# EAGLE board UsbStandaloneController (EAGLE 5.11)
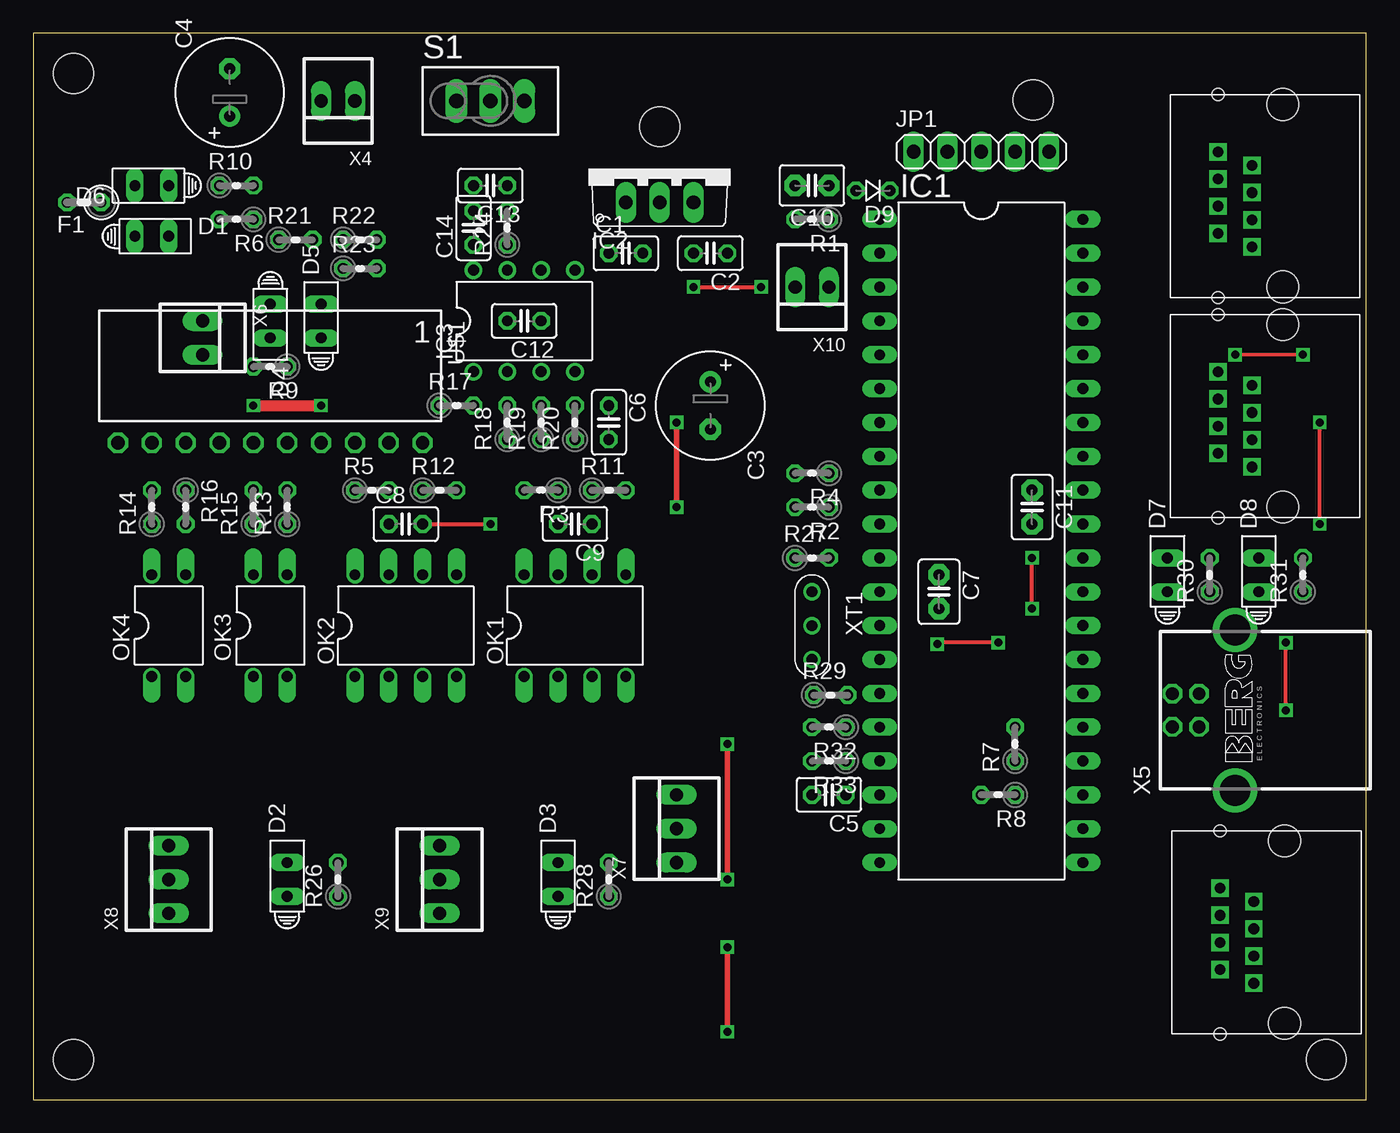
[diagram p0: board, top side]
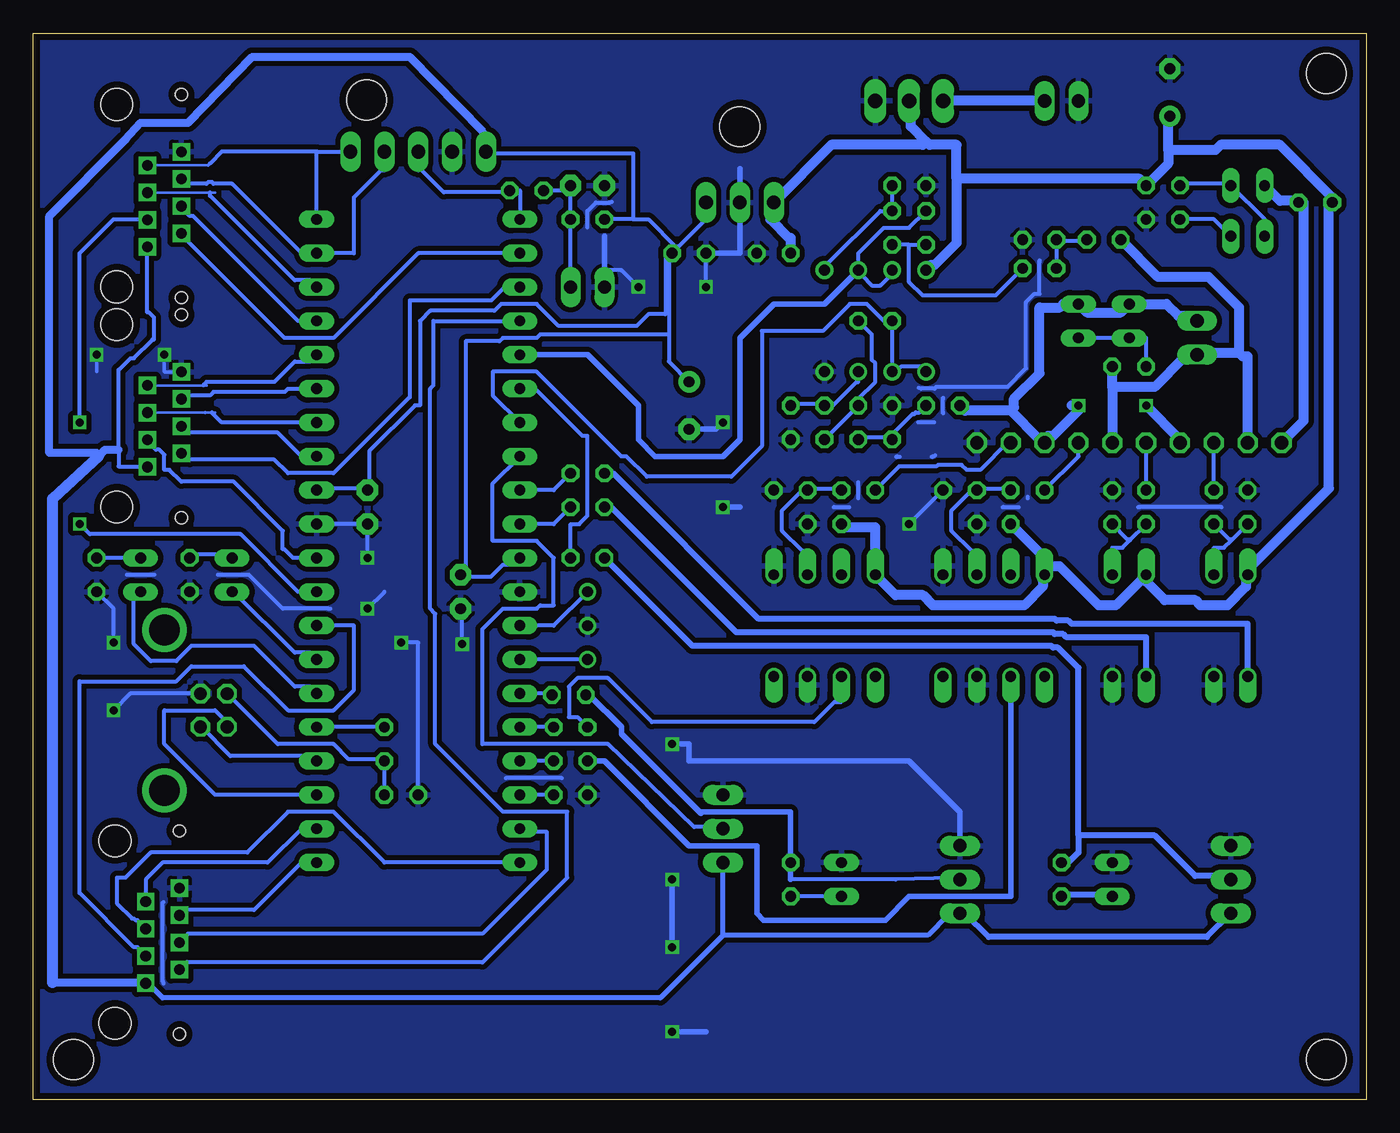
[diagram p1: board, bottom side, seen from below]

Size 100 x 80 mm. Coordinates in mm from the lower left corner, seen from the top.
Outline: 0,0 100,0 100,80 0,80 0,0
Copper layers (1*16): Top 0.035mm / dielectric 1.5mm / Bottom 0.035mm
Design rules "default *": minimum track width 12mil, minimum drill 24mil, track to track 15mil, track to pad 18mil, pad to pad 20mil, via to via 20mil, smd to smd 15mil, copper to edge 20mil, drill to drill 8mil, minimum pad ring 10mil, minimum via ring 8mil, stop-mask expansion 4mil, vias tented up to drill 0mil, thermal gap 10mil
Net classes: 1 pwr: width 0.762 mm
Holes 3 mm at 3,3 3,77 97,3 75,75 47,73

## Footprints (pad centres in the part's own frame; a part is rotated, then mirrored left to right if it is on the bottom)
C025-025X050 = drill 0.813 octagon: 1 -1.27,0; 2 1.27,0
E3,5-8 = drill 0.813 pad 1.6 round: + -1.778,0 | drill 0.813 pad 1.6 octagon: - 1.778,0
C2.5-3 = drill 0.813 pad 1.6 octagon: 1 -1.27,0; 2 1.27,0
HLMP6 = drill 0.813 long: A -1.27,0; K 1.27,0
D-2.5 = drill 0.813 octagon: A 1.27,0; C -1.27,0
0207/2V = drill 0.813 octagon: 1 -1.27,0; 2 1.27,0
DIL40 = drill 0.813 long: 1 -24.13,-7.62; 2 -21.59,-7.62; 3 -19.05,-7.62; 4 -16.51,-7.62; 5 -13.97,-7.62; 6 -11.43,-7.62; 7 -8.89,-7.62; 8 -6.35,-7.62; 9 -3.81,-7.62; 10 -1.27,-7.62; 11 1.27,-7.62; 12 3.81,-7.62; 13 6.35,-7.62; 14 8.89,-7.62; 15 11.43,-7.62; 16 13.97,-7.62; 17 16.51,-7.62; 18 19.05,-7.62; 19 21.59,-7.62; 20 24.13,-7.62; 21 24.13,7.62; 22 21.59,7.62; 23 19.05,7.62; 24 16.51,7.62; 25 13.97,7.62; 26 11.43,7.62; 27 8.89,7.62; 28 6.35,7.62; 29 3.81,7.62; 30 1.27,7.62; 31 -1.27,7.62; 32 -3.81,7.62; 33 -6.35,7.62; 34 -8.89,7.62; 35 -11.43,7.62; 36 -13.97,7.62; 37 -16.51,7.62; 38 -19.05,7.62; 39 -21.59,7.62; 40 -24.13,7.62
TO220V = drill 1.016 long: 1 -2.54,-2.54; 2 0,-2.54; 3 2.54,-2.54
DIL08 = drill 0.813 pad 1.27 round: 1 -3.81,-3.81; 2 -1.27,-3.81; 3 1.27,-3.81; 4 3.81,-3.81; 5 3.81,3.81; 6 1.27,3.81; 7 -1.27,3.81; 8 -3.81,3.81
1X05 = drill 1.016 long: 1 -5.08,0; 2 -2.54,0; 3 0,0; 4 2.54,0; 5 5.08,0
DIL08' = drill 0.813 offset: 1 -3.81,-3.81; 2 -1.27,-3.81; 3 1.27,-3.81; 4 3.81,-3.81; 5 3.81,3.81; 6 1.27,3.81; 7 -1.27,3.81; 8 -3.81,3.81
DIL04 = drill 0.813 offset: 1 -1.27,-3.81; 2 1.27,-3.81; 3 1.27,3.81; 4 -1.27,3.81
0204V = drill 0.813 octagon: 1 -1.27,0; 2 1.27,0
TL3XPO = drill 1.1 pad 1.422 long: 1 -2.54,0; 2 0,0; 3 2.54,0
SSW-110-02-S-S-RA = drill 1 pad 1.5 octagon: 1 -11.43,1.524; 2 -8.89,1.524; 3 -6.35,1.524; 4 -3.81,1.524; 5 -1.27,1.524; 6 1.27,1.524; 7 3.81,1.524; 8 6.35,1.524; 9 8.89,1.524; 10 11.43,1.524
C-00159 = drill 0.8 square: P$1 0,0.8; P$2 2.54,-0.22; P$3 0,-1.24; P$4 2.54,-2.26; P$5 0,-3.28; P$6 2.54,-4.3; P$7 0,-5.32; P$8 2.54,-6.34 | hole 2.4: -2.3,-9.885; -2.3,3.805 | hole 0.9: 2.54,4.605; 2.54,-10.635
22-23-2021 = drill 1 long: 1 -1.27,0; 2 1.27,0
PN61729-S = drill 0.95 octagon: 1 1.25,4.71; 2 -1.25,4.71; 3 -1.25,2.71; 4 1.25,2.71 | drill 2.3 pad 2.9 round: S1 -6.02,0; S2 6.02,0
22-23-2031 = drill 1 long: 1 -2.54,0; 2 0,0; 3 2.54,0
S3P = drill 0.8 round: P$1 -2.54,0; P$2 0,0; P$3 2.54,0

## Placement (x,y rotation side)
C1  0.1uF  [C025-025X050]  44.45,63.5 0 top
C2  0.1uF  [C025-025X050]  50.8,63.5 180 top
C3  470uF  [E3,5-8]  50.8,52.07 270 top
C4  470uF  [E3,5-8]  14.73,75.56 90 top
C5  0.47uF  [C025-025X050]  59.69,22.86 180 top
C6  47pF  [C025-025X050]  43.18,50.8 270 top
C7  0.1uF  [C2.5-3]  67.94,38.1 270 top
C8  [C025-025X050]  27.94,43.18 0 top
C9  [C025-025X050]  40.64,43.18 180 top
C10  [C2.5-3]  58.42,68.58 180 top
C11  0.1uF  [C2.5-3]  74.93,44.45 270 top
C12  47pF  [C025-025X050]  36.83,58.42 180 top
C13  47pF  [C025-025X050]  34.29,68.58 180 top
C14  47pF  [C025-025X050]  33.02,65.41 90 top
D1  HLMP6  [HLMP6]  8.89,64.77 0 top
D2  HLMP6  [HLMP6]  19.05,16.51 90 top
D3  HLMP6  [HLMP6]  39.37,16.51 90 top
D4  HLMP6  [HLMP6]  17.78,58.42 270 top
D5  HLMP6  [HLMP6]  21.59,58.42 90 top
D6  HLMP6  [HLMP6]  8.89,68.58 180 top
D7  HLMP6  [HLMP6]  85.09,39.37 90 top
D8  HLMP6  [HLMP6]  91.95,39.37 90 top
D9  [D-2.5]  62.99,68.2 180 top
F1  POLYSWITCH  [0207/2V]  3.81,67.31 180 top
IC1  PIC18F4550_40  [DIL40]  71.12,41.91 270 top
IC2  7805TV  [TO220V]  46.99,69.85 0 top
IC3  AD648N  [DIL08]  36.83,58.42 0 top
JP1  [1X05]  71.12,71.12 0 top
OK1  HCPL4502  [DIL08']  40.64,35.56 0 top
OK2  HCPL4502  [DIL08']  27.94,35.56 0 top
OK3  PC817  [DIL04]  17.78,35.56 0 top
OK4  PC817  [DIL04]  10.16,35.56 0 top
R1  10k ohm  [0204V]  58.42,66.04 180 top
R2  330 ohm  [0204V]  58.42,44.45 180 top
R3  330ohm  [0204V]  38.1,45.72 180 top
R4  330 ohm  [0204V]  58.42,46.99 180 top
R5  330ohm  [0204V]  25.4,45.72 0 top
R6  1kohm  [0204V]  15.24,66.04 180 top
R7  100kohm  [0204V]  73.66,26.67 90 top
R8  100kohm  [0204V]  72.39,22.86 180 top
R9  2k Ohm  [0204V]  17.78,54.99 180 top
R10  10k ohm  [0204V]  15.24,68.58 0 top
R11  10kohm  [0204V]  43.18,45.72 0 top
R12  10k ohm  [0204V]  30.48,45.72 0 top
R13  10kohm  [0204V]  19.05,44.45 90 top
R14  10kohm  [0204V]  8.89,44.45 90 top
R15  330ohm  [0204V]  16.51,44.45 90 top
R16  330ohm  [0204V]  11.43,44.45 270 top
R17  1.8k ohm  [0204V]  31.75,52.07 0 top
R18  1.3k ohm  [0204V]  35.56,50.8 90 top
R19  330kohm  [0204V]  38.1,50.8 90 top
R20  330k ohm  [0204V]  40.64,50.8 90 top
R21  1.8k ohm  [0204V]  19.68,64.52 0 top
R22  1.3k ohm  [0204V]  24.51,64.52 0 top
R23  330k ohm  [0204V]  24.51,62.36 0 top
R24  330k ohm  [0204V]  35.56,65.41 90 top
R26  1kohm  [0204V]  22.86,16.51 90 top
R27  10kOhm  [0204V]  58.42,40.64 0 top
R28  1kOhm  [0204V]  43.18,16.51 90 top
R29  10kOhm  [0204V]  59.82,30.35 0 top
R30  1kohm  [0204V]  88.27,39.37 90 top
R31  1kohm  [0204V]  95.25,39.37 90 top
R32  330ohm  [0204V]  59.69,27.94 180 top
R33  330ohm  [0204V]  59.69,25.4 180 top
S1  TL32PO  [TL3XPO]  34.29,74.93 0 top
U$1  MP4212  [SSW-110-02-S-S-RA]  17.78,50.8 180 top
X1  AKI-RJ45  [C-00159]  91.44,48.26 180 top
X2  AKI-RJ45  [C-00159]  91.57,9.53 180 top
X3  AKI-RJ45  [C-00159]  91.44,64.77 180 top
X4  22-23-2021  [22-23-2021]  22.86,74.93 180 top
X5  PN61729-S  [PN61729-S]  90.17,29.21 90 top
X6  22-23-2021  [22-23-2021]  12.7,57.15 270 top
X7  22-23-2031  [22-23-2031]  48.26,20.32 90 top
X8  22-23-2031  [22-23-2031]  10.16,16.51 90 top
X9  22-23-2031  [22-23-2031]  30.48,16.51 90 top
X10  22-23-2021  [22-23-2021]  58.42,60.96 180 top
XT1  CSTLS  [S3P]  58.42,35.56 270 top

## Library data of the parts
C1-C6 C8 C9 C12-C14 R1 R7 R8 R26-R29 = rcl
C7 C10 C11 = capacitor-wima
D1-D8 = display-hp; MF: AGILENT TECHNOLOGIES; MPN: HLMP-6500; OC_FARNELL: 1652490; OC_NEWARK: 40K0088
D9 = diode
F1 U$1 X1-X3 = myparts
IC1 = microchip; MF: MICROCHIP; MPN: PIC18F4550-I/P; OC_FARNELL: 9321357; OC_NEWARK: 74K8623
IC2 IC3 = linear
JP1 = pinhead
OK1 OK2 = optocoupler; MF: AGILENT TECHNOLOGIES; MPN: HCPL-4502-000E; OC_FARNELL: 9994777; OC_NEWARK: 31K7017
OK3 OK4 = optocoupler; MPN: PC817X4J000F; OC_FARNELL: 9707727; OC_NEWARK: 97K7059
R2-R6 R9-R24 R30-R33 = resistor
S1 = switch
X4 X6 X10 = con-molex; MF: MOLEX; MPN: 22-23-2021; OC_FARNELL: 1462926; OC_NEWARK: 25C3832
X5 = con-berg; OC_FARNELL: unknown; OC_NEWARK: unknown
X7-X9 = con-molex; MF: MOLEX; MPN: 22-23-2031; OC_FARNELL: 1462950; OC_NEWARK: 30C0862
XT1 = TOG

## Nets
+5V: C2.1 C3.+ C7.1 C11.1 IC1.11 IC1.32 IC2.3 JP1.1 R1.2 X1.P$1 X2.P$1 X3.P$1 X7.1 X8.1 X9.1
+12V [pwr]: C1.1 C4.+ C8.1 C9.2 F1.2 IC2.1 IC3.8 OK1.8 OK2.8 OK3.4 OK4.4 R10.2 S1.2
AN5: IC1.8 X7.2
FEEDBACK_LEFT: C12.2 IC1.7 IC3.1 IC3.2
FEEDBACK_RIGHT: C14.2 IC1.5 IC3.6 IC3.7
GND: C1.2 C2.2 C3.- C4.- C5.2 C6.2 C7.2 C8.2 C9.1 C10.2 C11.2 C13.2 D2.K D3.K IC1.12 IC1.31 IC2.2 IC3.4 JP1.2 OK1.3 OK1.5 OK2.3 OK2.5 OK3.2 OK4.2 R6.1 R8.2 R11.2 R12.2 R13.2 R14.2 R18.2 R22.2 R30.1 R31.1 S1.3 U$1.1 X1.P$8 X2.P$8 X3.P$8 X4.2 X5.4 X7.3 X8.3 X9.3 X10.2 XT1.P$2
HIGH_LEFT: IC1.10 R2.1
HIGH_RIGHT: IC1.9 R4.1
IC1_RA0: IC1.2 X3.P$2
IC1_RA1: IC1.3 X1.P$2
IC1_RA2: IC1.4 X2.P$2
IC1_RB0: IC1.33 X1.P$4
IC1_RB1: IC1.34 X1.P$5
IC1_RB2: IC1.35 X1.P$6
IC1_RB3: IC1.36 X1.P$7
IC1_RB4: IC1.37 X3.P$4
IC1_RB5: IC1.38 X3.P$5
IC1_RB6: IC1.39 JP1.4 X3.P$6
IC1_RB7: IC1.40 JP1.5 X3.P$7
IC1_RD0: IC1.19 X2.P$4
IC1_RD1: IC1.20 X2.P$5
IC1_RD2: IC1.21 X2.P$6
IC1_RD3: IC1.22 X2.P$7
IC1_RD5: IC1.28 X2.P$3
IC1_RD6: IC1.29 X3.P$3
IC1_RD7: IC1.30 X1.P$3
LOW_LEFT: IC1.16 R32.1
LOW_RIGHT: IC1.17 R33.1
N$1: C5.1 IC1.18
N$2: IC1.14 XT1.P$3
N$3: R17.2 R18.1 R19.1
N$4: D9.C IC1.1 JP1.3
N$5: R3.2 U$1.2
N$6: C12.1 R19.2 R20.1
N$7: R5.1 U$1.4
N$8 [pwr]: S1.1 X4.1
N$9: C6.1 IC3.3 R20.2
N$10: C10.1 D9.A R1.1 X10.1
N$11: C14.1 R23.2 R24.1
N$12: R21.2 R22.1 R23.1
N$13: C13.1 IC3.5 R24.2
N$14: IC1.13 XT1.P$1
N$15: D1.K R6.2
N$16: IC1.25 R7.2
N$17: R7.1 R8.1 X5.1
N$18: R26.2 R27.1 X8.2
N$19: D2.A R26.1
N$20: R28.2 R29.1 X9.2
N$21: D3.A R28.1
N$22: D7.K R30.2
N$23: D8.K R31.2
N$24: OK3.1 R2.2
N$25 [pwr]: D6.K F1.1 U$1.10
N$26: OK1.6 R3.1 R11.1
N$27: IC1.24 X5.3
N$28: OK1.2 R32.2
N$29: IC1.23 X5.2
N$30: OK2.6 R5.2 R12.1
N$31: OK2.2 R33.2
N$35: D4.K D5.A R9.2
N$36: D1.A D6.A R10.1
N$38: OK4.1 R4.2
N$39: R15.2 U$1.6
N$41: OK3.3 R13.1 R15.1
N$42: OK4.3 R14.1 R16.2
N$43: R16.1 U$1.8
RA4: IC1.6 R27.2
RC0: IC1.15 R29.2
RC7: D8.A IC1.26
RD4: D7.A IC1.27
V+ [pwr]: D4.A D5.K R17.1 U$1.3 U$1.7 X6.1
V- [pwr]: R9.1 R21.1 U$1.5 U$1.9 X6.2

## Tracks (layer width: path | path; a pad name or v marks a point on that pad's centre or on a via)
+5V
  Bottom 0.305: X3.P$1 91.44,59.05 91.31,59.05 90.93,58.67 90.93,57.02 91.06,57.02 92.46,55.63 92.71,55.63 93.6,54.74 93.6,48.77 93.6,47.5 91.44,47.5 X1.P$1 | 91.69,8.76 X2.P$1 91.82,8.76 | C2.1 49.53,66.04 IC2.3 | 54.99,66.04 53.85,66.04 51.82,64.01 51.69,64.01 C2.1 | 54.99,66.04 R1.2 | 54.99,66.04 54.99,70.99 66.04,70.99 JP1.1 66.04,72.52 66.29,72.64 | 95.06,48.32 95.25,48.51 | IC1.11 64.01,40.13 64.77,40.13 65.66,39.24 67.82,39.24 C7.1 67.56,39.37 67.56,56.9 65.02,56.9 64.77,57.15 62.23,57.15 61.98,57.4 52.32,57.4 | C3.+ 52.32,55.37 52.32,57.4 | 52.32,57.4 52.32,63.37 52.07,63.37 C2.1 | IC1.32 78.61,45.85 75.06,45.85 C11.1 75.06,45.97 74.8,45.97 74.8,48.64 71.37,52.07 70.99,52.07 70.99,58.42 70.23,59.18 65.41,59.18 64.9,59.69 62.23,59.69 60.58,58.04 54.74,58.04 53.85,58.93 52.58,58.93 52.58,63.37 52.32,63.63 52.2,63.63 C2.1
  Bottom 0.381: 48.26,12.32 X7.1 | 48.26,12.32 32.89,12.32 31.37,13.84 30.61,13.84 X9.1 | 48.26,12.32 52.96,7.62 90.3,7.62 91.31,8.64 91.57,8.64 X2.P$1
  Bottom 0.457: X8.1 11.94,12.19 28.32,12.19 30.1,13.97 X9.1
  Bottom 0.61: 95.06,48.32 94.61,48.77 93.6,48.77 | 91.82,8.76 98.55,8.76 | 66.29,72.64 71.75,78.23 83.57,78.23 88.39,73.28 91.95,73.28 93.09,72.01 98.81,66.29 98.81,48.51 95.25,48.51
  Bottom 0.813: 95.06,48.32 98.55,45.09 98.55,8.76
+12V
  Bottom 0.762: OK2.8 24.13,40.64 | C9.2 39.24,43.18 38.99,42.93 36.83,42.93 OK1.8 35.31,37.85 33.27,37.85 32.51,37.08 25.65,37.08 24.26,38.48 24.26,38.99 24.13,38.99 OK2.8 | C8.1 24.38,40.89 OK2.8 | C1.1 43.18,64.64 43.31,64.64 44.7,66.04 44.7,67.31 IC2.1 40.13,71.63 33.27,71.63 33.02,71.88 | OK2.8 23.88,40.01 22.99,40.01 20.07,37.08 18.8,37.08 OK3.4 16.51,38.86 15.11,37.47 12.83,37.47 12.45,37.08 10.41,37.08 9.02,38.48 9.02,39.12 OK4.4 8.89,39.75 2.79,45.85 2.79,67.06 F1.2 2.41,67.56 6.48,71.63 10.92,71.63 11.3,71.25 14.86,71.25 | 14.86,71.25 14.86,73.79 C4.+ | 14.86,71.25 14.86,70.23 R10.2 17.02,69.09 30.73,69.09 | IC3.8 32.64,62.61 32.38,62.61 30.73,64.26 30.73,69.09 | 30.73,69.09 30.73,71.63 32.77,71.63 33.02,71.88 | 33.02,71.88 34.16,73.03 34.16,74.93 S1.2
AN5
  Bottom 0.305: IC1.8 65.53,46.23 65.53,41.91 62.23,41.91 60.96,40.64 60.96,37.08 61.98,37.08 62.23,36.83 64.77,36.83 66.29,35.31 66.29,26.67 56.9,26.67 50.42,20.45 48.39,20.45 X7.2
FEEDBACK_LEFT
  Bottom 0.305: IC3.1 33.4,54.99 34.92,54.99 35.31,54.61 IC3.2 C12.2 36.2,58.42 37.47,59.69 38.73,59.69 40.77,57.66 45.34,57.66 45.34,49.02 47.62,46.74 53.98,46.74 55.5,48.26 55.88,48.26 62.23,54.61 65.53,54.61 65.53,52.83 IC1.7
FEEDBACK_RIGHT
  Bottom 0.305: IC3.7 35.56,61.72 35.81,61.72 36.45,61.09 37.08,61.09 37.85,61.85 37.97,61.85 IC3.6 38.1,63.5 36.2,65.41 34.29,65.41 C14.2
  Bottom 0.406: IC1.5 58.42,55.88 54.61,52.07 54.61,49.53 53.34,48.26 48.26,48.26 46.99,49.53 46.99,57.15 44.45,59.69 40.64,59.69 IC3.6
GND  (via drill 0.6)
  Top 0.254: v90.17,55.88 v95.25,55.88
  Top 0.305: v49.53,60.96 v54.61,60.96 | v93.98,29.21 v93.98,34.29 | C8.2 v34.29,43.18 | v72.39,34.29 67.94,34.29 v67.82,34.16 | v74.93,36.83 v74.93,40.64
  Top 0.406: v52.07,26.67 v52.07,16.51 | v52.07,11.43 v52.07,5.08 | v48.26,44.45 v48.26,50.8
  Bottom 0.254: X1.P$8 90.16,54.6 90.17,54.61 v90.17,55.88 | v95.25,55.88 95.25,54.61
  Bottom 0.305: 26.07,44.45 26.16,44.45 27.18,44.45 27.27,44.45 | 90.25,14.82 90.3,14.73 90.3,8.89 90.24,8.72 | 60.36,24.13 64.55,24.13 | 38.77,44.45 38.86,44.45 39.88,44.45 39.97,44.45 | 38.1,45.12 38.1,46.32 | 32.42,50.8 33.62,50.8 | 56.6,67.36 56.77,67.31 57.78,67.31 58.42,66.67 58.42,65.44 | 24.51,62.95 24.51,62.87 24.51,60.45 24.89,60.45 25.53,59.82 25.53,54.86 26.92,53.47 32.26,53.47 32.38,53.34 33.4,53.34 33.57,53.39 | 77.69,36.83 77.85,36.83 81.28,36.83 83.82,39.37 85.98,39.37 86.14,39.37 | 92.99,39.37 92.84,39.37 91.06,39.37 90.9,39.37 | 57.15,62.23 55.88,62.23 v54.61,60.96 | v49.53,60.96 C2.2 | 32.35,48.33 32.51,48.26 32.59,48.21 | X5.4 92.73,30.46 v93.98,29.21 | v93.98,34.29 93.98,36.83 R31.1 | 25.4,45.12 25.4,45.21 | 31.75,52.67 31.75,52.58 31.75,51.56 31.75,51.47 | v34.29,43.18 R12.2 | 34.99,48.23 35.18,48.26 35.26,48.21 | 10.83,44.45 17.02,44.45 17.11,44.45 | R8.2 71.12,34.29 v72.39,34.29 | v67.82,34.16 67.82,36.7 C7.2 | IC1.31 C11.2 v74.93,40.64 | v74.93,36.83 73.66,38.1
  Bottom 0.406: C2.2 46.99,63.5 46.99,69.85 | 57.15,62.23 57.15,64.77 | X9.3 30.48,21.59 34.29,25.4 50.8,25.4 50.8,26.67 v52.07,26.67 | v52.07,16.51 v52.07,11.43 | v52.07,5.08 49.53,5.08 | C3.- 48.77,50.29 v48.26,50.8 | 46.99,44.45 v48.26,44.45
  pour Bottom: -2.54,80.01 0,0 100.33,0 100.33,80.01
HIGH_LEFT
  Bottom 0.305: R2.1 60.96,43.18 IC1.10
HIGH_RIGHT
  Bottom 0.305: R4.1 60.96,45.72 IC1.9
IC1_RA0
  Bottom 0.305: IC1.2 71.12,63.5 77.47,57.15 81.15,57.15 88.9,64.9 X3.P$2
IC1_RA1
  Bottom 0.305: IC1.3 64.64,60.96 65.66,59.94 71.75,59.94 71.75,52.7 77.47,46.99 80.9,46.99 81.92,48.01 88.52,48.01 88.9,48.39 X1.P$2
IC1_RA2
  Bottom 0.305: IC1.4 69.98,58.42 69.98,53.59 70.23,53.34 70.23,36.83 69.85,36.45 69.85,26.67 64.77,21.59 59.94,21.59 59.94,16.64 66.29,10.29 88.52,10.29 89.03,9.78 X2.P$2
IC1_RB0
  Bottom 0.305: IC1.33 79.88,48.26 81.66,50.04 88.52,50.04 88.9,50.42 X1.P$4
IC1_RB1
  Bottom 0.2: 86.36,51.54 86.61,51.54 87.12,51.54 X1.P$5
  Bottom 0.254: IC1.34 78.87,50.93 | 87.12,51.54 87.12,51.56
  Bottom 0.305: IC1.34 85.85,50.8 86.61,51.56 86.61,51.54
IC1_RB2
  Bottom 0.305: IC1.35 80.9,53.34 81.15,53.09 86.49,53.09 86.74,52.83 88.65,52.83 88.9,52.58 X1.P$6
IC1_RB3
  Bottom 0.2: 87,53.58 87.25,53.58 X1.P$7
  Bottom 0.305: IC1.36 79.25,55.37 80.39,55.37 81.92,53.85 87,53.85 87.25,53.59 87.25,53.58
IC1_RB4
  Bottom 0.305: IC1.37 80.14,58.42 88.01,66.29 88.27,66.29 88.9,66.93 X3.P$4
IC1_RB5
  Bottom 0.2: 86.36,68.05 86.74,68.05 X3.P$5
  Bottom 0.254: 86.74,68.05 86.74,68.07
  Bottom 0.305: IC1.38 79.25,61.47 80.39,61.47 86.74,67.82 86.74,68.05
IC1_RB6
  Bottom 0.305: X3.P$6 88.9,68.96 88.65,68.71 87,68.71 86.87,68.83 86.61,68.83 86.49,68.71 85.09,68.71 79.88,63.5 IC1.39 75.95,63.5 75.95,67.69 73.91,69.72 73.66,69.72 JP1.4
IC1_RB7
  Bottom 0.2: 86.87,70.09 X3.P$7
  Bottom 0.254: 86.74,70.23 86.87,70.1 86.87,70.09
  Bottom 0.305: IC1.40 78.74,71.12 | 78.74,71.12 JP1.5 | 86.74,70.23 85.85,71.12 78.74,71.12
IC1_RD0
  Bottom 0.305: IC1.19 63.25,20.07 61.47,20.07 61.47,17.27 66.29,12.45 88.39,12.45 89.03,11.81 X2.P$4
IC1_RD1
  Bottom 0.305: IC1.20 73.66,17.78 77.47,21.59 80.9,21.59 83.95,18.54 91.19,18.54 93.09,16.64 93.73,16.64 93.73,14.73 92.58,13.59 92.46,13.59 92.33,13.46 92.2,13.46 91.57,12.83 X2.P$5
IC1_RD2
  Bottom 0.305: IC1.21 79.88,17.78 83.44,14.22 88.65,14.22 89.03,13.84 X2.P$6
IC1_RD3
  Bottom 0.305: IC1.22 79.88,20.32 82.42,17.78 90.3,17.78 91.57,16.51 X2.P$7
IC1_RD5
  Bottom 0.305: IC1.28 75.95,35.56 75.95,30.73 77.47,29.21 80.9,29.21 84.2,32.51 88.14,32.51 89.28,31.37 96.52,31.37 96.52,15.49 92.46,11.43 92.2,11.43 91.57,10.79 X2.P$3
IC1_RD6  (via drill 0.6)
  Top 0.305: v96.52,43.18 v96.52,50.8
  Bottom 0.305: IC1.29 80.14,38.1 84.45,42.42 95.76,42.42 v96.52,43.18 | v96.52,50.8 96.52,63.5 93.98,66.04 91.47,66.04 X3.P$3
IC1_RD7
  Bottom 0.305: IC1.30 80.52,40.64 81.15,41.27 81.28,41.27 81.28,42.67 84.96,46.35 88.9,46.35 89.79,47.24 90.17,47.24 90.17,48.39 90.55,48.77 90.81,48.77 91.44,49.4 X1.P$3
LOW_LEFT
  Bottom 0.305: R32.1 IC1.16
LOW_RIGHT
  Bottom 0.305: R33.1 IC1.17
N$1
  Bottom 0.305: C5.1 IC1.18
N$2
  Bottom 0.305: XT1.P$3 IC1.14
N$3
  Bottom 0.305: R19.1 37.97,49.66 35.56,49.66 R18.1 35.69,49.78 34.04,51.44 33.91,51.44 33.78,51.56 33.53,51.56 R17.2
N$4
  Bottom 0.305: IC1.1 63.5,68.2 D9.C 64.26,68.07 69.22,68.07 70.87,69.72 71.12,69.72 JP1.3
N$5
  Bottom 0.305: R3.2 35.05,47.5 32.26,47.5 32.13,47.62 30.35,47.62 29.97,47.24 28.96,47.24 26.92,49.28 U$1.2
N$6
  Bottom 0.305: R20.1 R19.2 38.1,52.58 36.83,53.85 36.83,55.24 37.08,55.5 37.08,57.4 C12.1
N$7
  Bottom 0.305: R5.1 21.59,48.26 U$1.4
N$8
  Bottom 0.762: X4.1 S1.1
N$9
  Bottom 0.305: IC3.3 38.1,53.85 38.23,53.85 40.01,52.07 R20.2 40.64,52.2 43.05,52.2 C6.1
N$10
  Bottom 0.305: D9.A 59.82,68.2 C10.1 R1.1 X10.1
N$11
  Bottom 0.305: R23.2 27.81,60.33 33.27,60.33 34.29,61.34 34.29,64.14 | 34.29,64.14 C14.1 | 34.29,64.14 R24.1
N$12
  Bottom 0.305: R21.2 21.08,64.39 23.24,64.39 R22.1 R23.1
N$13
  Bottom 0.305: IC3.5 40.64,62.74 40.39,62.74 36.45,66.67 R24.2 C13.1
N$14
  Bottom 0.305: XT1.P$1 60.96,35.56 IC1.13
N$15
  Bottom 0.305: D1.K 11.43,66.04 R6.2
N$16
  Bottom 0.305: R7.2 IC1.25
N$17
  Bottom 0.305: R8.1 R7.1 73.66,25.53 76.33,25.53 77.47,26.67 81.66,26.67 85.34,30.35 X5.1
N$18
  Bottom 0.457: R27.1 50.55,34.04 23.62,34.04 23.5,33.91 23.11,33.91 21.59,32.38 21.59,19.81 | 21.59,19.81 21.59,18.54 22.35,17.78 R26.2 | X8.2 10.41,16.76 12.83,16.76 15.88,19.81 21.59,19.81
N$19
  Bottom 0.457: D2.A 19.18,15.37 22.73,15.37 R26.1
N$20
  Bottom 0.305: X9.2 30.99,16.64 35.31,16.51 43.18,16.51
  Bottom 0.406: R29.1 58.29,30.35 55.88,27.94 55.88,27.43 49.91,21.46 49.91,21.59 43.18,21.59 R28.2 43.18,16.51
N$21
  Bottom 0.305: D3.A R28.1
N$22
  Bottom 0.305: D7.K 85.34,40.89 88.01,40.89 R30.2
N$23
  Bottom 0.305: D8.K R31.2
N$24
  Bottom 0.457: OK3.1 16.51,34.67 22.48,34.67 22.73,34.92 23.37,34.92 23.5,35.05 47.24,35.05 56.64,44.45 R2.2
N$25
  Bottom 0.762: D6.K 6.48,67.44 5.59,67.44 5.46,67.31 F1.1 4.7,67.31 4.7,50.93 U$1.10
N$26
  Bottom 0.305: OK1.6 41.91,41.15 42.29,41.15 43.81,42.67 43.81,44.2 42.29,45.72 R11.1 41.91,45.85 39.5,45.85 R3.1
N$27
  Bottom 0.305: IC1.24 79.12,25.78 85.22,25.78 87.38,27.94 X5.3
N$28
  Bottom 0.305: OK1.2 39.37,29.84 39.88,29.84 41.4,28.32 53.59,28.32 56.9,31.62 59.18,31.62 59.82,30.99 59.82,28.7 59.18,28.7 R32.2
N$29
  Bottom 0.305: X5.2 85.46,28.31 86.36,29.21 90.17,29.21 90.17,26.67 86.36,22.86 IC1.23
N$30
  Bottom 0.305: OK2.6 29.21,41.15 29.59,41.15 31.11,42.67 31.11,44.2 29.59,45.72 R12.1 29.21,45.85 26.8,45.85 R5.2
N$31
  Bottom 0.406: OK2.2 26.67,15.24 34.29,15.24 36.07,13.46 45.21,13.46 45.72,13.97 45.72,19.05 50.8,19.05 57.15,25.4 R33.2
N$35
  Bottom 0.305: R9.2 16.51,57.15 D4.K D5.A
N$36
  Bottom 0.305: D1.A 7.62,66.04 D6.A 10.16,68.71 13.84,68.71 R10.1
N$38
  Bottom 0.457: OK4.1 8.89,35.69 22.1,35.69 22.35,35.94 23.24,35.94 23.37,36.07 45.59,36.07 56.52,46.99 R4.2
N$39
  Bottom 0.305: R15.2 U$1.6
N$41
  Bottom 0.305: OK3.3 19.05,41.4 18.29,41.4 17.72,41.97 | 17.72,41.97 R15.1 | R13.1 17.91,42.04 17.78,42.04 17.72,41.97
N$42
  Bottom 0.305: OK4.3 11.43,41.4 10.67,41.4 10.1,41.97 | 10.1,41.97 R14.1 | R16.2 10.29,42.04 10.16,42.04 10.1,41.97
N$43
  Bottom 0.305: R16.1 U$1.8
RA4
  Bottom 0.305: R27.2 59.69,43.18 59.05,43.18 58.42,43.81 58.42,49.78 58.8,49.78 62.36,53.34 IC1.6
RC0
  Bottom 0.305: R29.2 61.21,30.48 IC1.15
RC7
  Bottom 0.305: IC1.26 79.25,30.99 80.39,30.99 83.44,34.04 88.14,34.04 89.28,32.89 91.19,32.89 92.46,34.16 92.46,38.1 D8.A
RD4
  Bottom 0.305: IC1.27 79.25,33.53 80.39,33.53 84.96,38.1 D7.A
V+  (via drill 0.6)
  Top 0.813: v16.51,52.07 v21.59,52.07
  Bottom 0.762: D5.K 21.84,59.56 | U$1.3 23.75,49.28 | v16.51,52.07 13.97,49.53 U$1.7 | U$1.3 23.88,49.78 23.5,49.78 21.46,51.82 v21.59,52.07 22.1,52.07 | D5.K 20.95,59.05 18.41,59.05 D4.A 14.99,59.69 14.1,58.8 13.08,58.8 X6.1 | R17.1 30.1,51.69 26.67,51.69 | 26.67,51.69 24.51,49.53 24.38,49.53 U$1.3 | 26.67,51.69 26.42,51.94 26.42,52.58 24.51,54.48 24.51,59.44 22.99,59.44 22.73,59.69 D5.K
V-
  Bottom 0.762: 19.05,53.47 U$1.5 | 19.05,53.47 R9.1 | R21.1 15.62,61.72 11.81,61.72 9.53,59.44 9.53,56.01 | 9.53,56.01 12.57,56.01 X6.2 12.95,55.63 13.72,55.63 15.88,53.47 19.05,53.47 | U$1.9 8.89,55.75 9.27,55.75 9.53,56.01